# EAGLE board untitled (EAGLE 9.3.2)
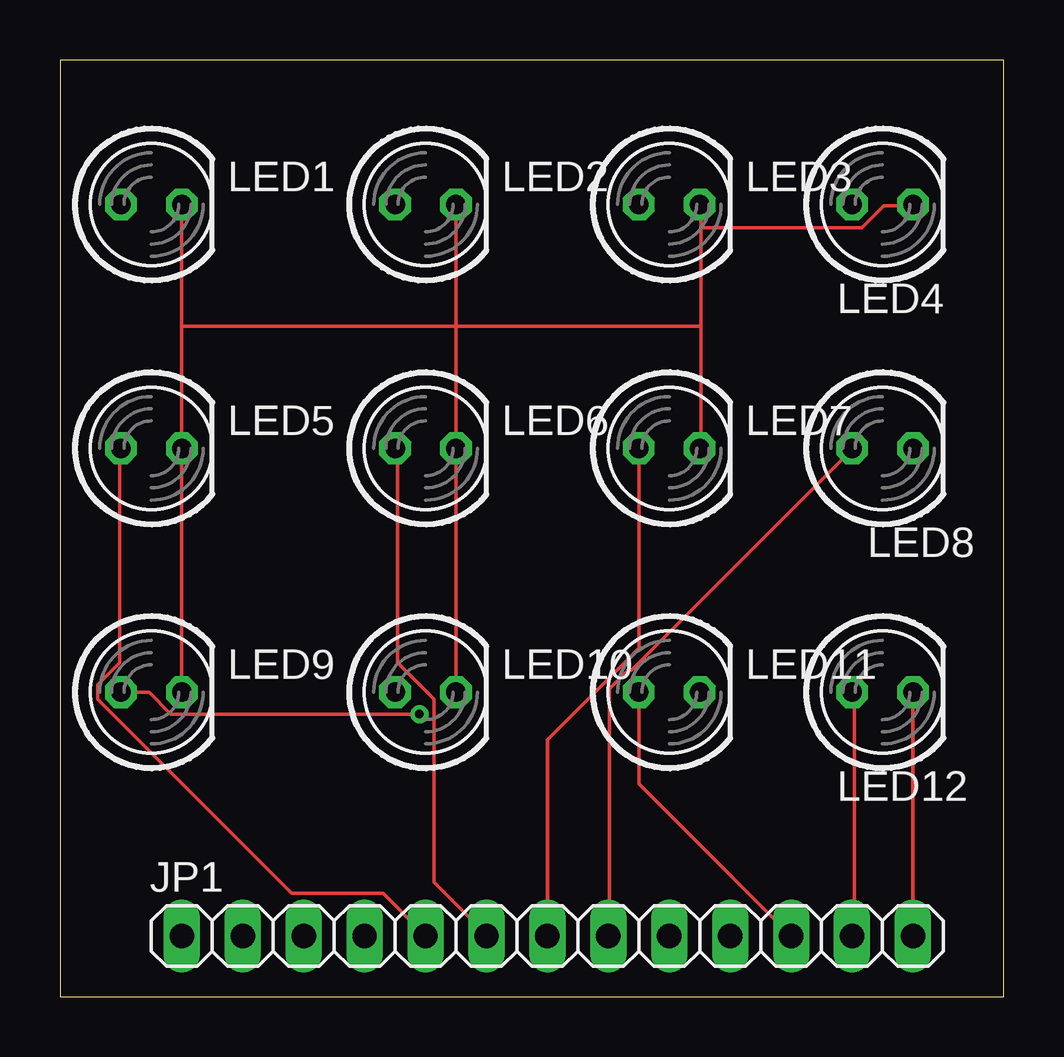
[diagram p0: board, top side]
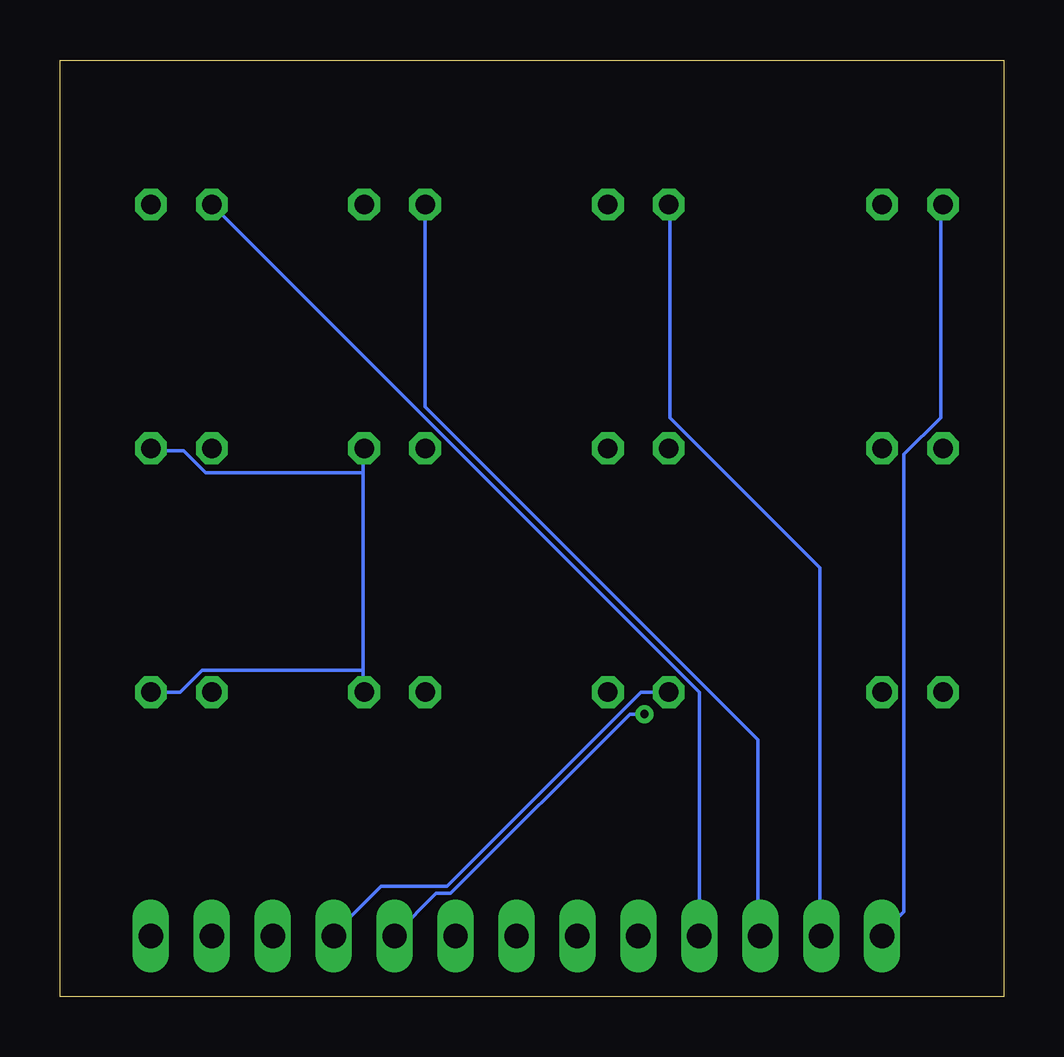
[diagram p1: board, bottom side, seen from below]

Size 39.35 x 39.04 mm. Coordinates in mm from the lower left corner, seen from the top.
Outline: 0,0 39.35,0 39.35,39.04 0,39.04 0,0
Copper layers (1*16): Top 0.035mm / dielectric 1.5mm / Bottom 0.035mm
Design rules "default": minimum track width 6mil, minimum drill 0.35mm, track to track 6mil, track to pad 6mil, pad to pad 6mil, via to via 6mil, smd to smd 6mil, copper to edge 40mil, drill to drill 6mil, minimum pad ring 10mil, minimum via ring 8mil, stop-mask expansion 4mil, vias tented up to drill 0mil, thermal gap 10mil

## Footprints (pad centres in the part's own frame; a part is rotated, then mirrored left to right if it is on the bottom)
1X13 = drill 1.016 long: 1 -15.24,0; 2 -12.7,0; 3 -10.16,0; 4 -7.62,0; 5 -5.08,0; 6 -2.54,0; 7 0,0; 8 2.54,0; 9 5.08,0; 10 7.62,0; 11 10.16,0; 12 12.7,0; 13 15.24,0
LED5MM = drill 0.813 octagon: A -1.27,0; K 1.27,0

## Placement (x,y rotation side)
JP1  [1X13]  20.32,2.54 0 top
LED1  [LED5MM]  3.81,33.02 0 top
LED2  [LED5MM]  15.24,33.02 0 top
LED3  [LED5MM]  25.4,33.02 0 top
LED4  [LED5MM]  34.29,33.02 0 top
LED5  [LED5MM]  3.81,22.86 0 top
LED6  [LED5MM]  15.24,22.86 0 top
LED7  [LED5MM]  25.4,22.86 0 top
LED8  [LED5MM]  34.29,22.86 0 top
LED9  [LED5MM]  3.81,12.7 0 top
LED10  [LED5MM]  15.24,12.7 0 top
LED11  [LED5MM]  25.4,12.7 0 top
LED12  [LED5MM]  34.29,12.7 0 top

## Library data of the parts
JP1 = pinhead
LED1-LED12 = led

## Nets
N$1: JP1.1 LED1.A
N$2: JP1.2 LED2.A
N$3: JP1.3 LED3.A
N$4: JP1.4 LED4.A
N$5: JP1.5 LED5.A
N$6: JP1.6 LED6.A
N$7: JP1.7 LED7.A
N$8: JP1.8 LED8.A
N$9: JP1.9 LED9.A
N$10: JP1.10 LED10.A
N$11: JP1.11 LED11.A
N$12: JP1.12 LED12.A
N$13: JP1.13 LED1.K LED2.K LED3.K LED4.K LED5.K LED6.K LED7.K LED8.K LED9.K LED10.K LED11.K LED12.K

## Tracks (layer width: path | path; a pad name or v marks a point on that pad's centre or on a via)
N$1
  Bottom 0.152: LED1.A 2.64,32.97 2.64,24.13 4.17,22.61 4.17,3.56 5.08,2.64 JP1.1
N$2
  Bottom 0.152: LED2.A 13.92,32.97 13.92,24.13 7.67,17.88 7.67,2.64 JP1.2
N$3
  Bottom 0.152: LED3.A 24.13,24.59 10.26,10.72 10.26,2.64 JP1.3
N$4
  Bottom 0.152: LED4.A 12.7,12.7 JP1.4
N$5
  Top 0.152: JP1.5 13.46,4.32 9.65,4.32 1.57,12.39 1.57,13.01 2.49,13.92 2.49,22.76 LED5.A
N$6
  Top 0.152: LED6.A 14.07,22.76 14.07,13.92 15.6,12.39 15.6,4.78 17.73,2.64 JP1.6
N$7
  Top 0.152: LED7.A 24.13,14.53 20.32,10.72 JP1.7
N$8
  Top 0.152: LED8.A 32.97,22.76 23.82,13.61 23.67,13.61 22.91,12.85 22.91,2.64 JP1.8
N$9  (via drill 0.35)
  Top 0.152: LED9.A 3.71,12.7 4.62,11.79 v14.99,11.79
  Bottom 0.152: v14.99,11.79 15.6,11.79 23.06,4.32 23.67,4.32 25.35,2.64 JP1.9
N$10
  Bottom 0.152: LED10.A 15.14,12.7 23.22,4.62 25.96,4.62 27.94,2.64 JP1.10
N$11
  Top 0.152: LED11.A 24.13,8.89 JP1.11
N$12
  Top 0.152: LED12.A 33.12,12.7 33.12,2.64 JP1.12
N$13
  Top 0.152: LED9.K LED5.K 5.08,27.94 | 5.08,27.94 LED1.K | LED10.K LED6.K 16.51,27.94 | 16.51,27.94 LED2.K | 16.51,27.94 5.08,27.94 | 26.72,27.94 26.72,22.91 LED7.K | 26.72,27.94 26.72,32.05 | 26.72,32.05 26.72,32.97 LED3.K | 26.72,32.05 33.43,32.05 34.34,32.97 35.56,32.97 LED4.K | LED12.K JP1.13 | 26.72,27.94 16.51,27.94
  Bottom 0.152: 26.72,21.84 26.72,22.76 LED7.K | 26.72,21.84 26.72,13.61 | 26.72,13.61 26.72,12.7 LED11.K | LED12.K 34.34,12.7 33.43,13.61 26.72,13.61 | 26.72,21.84 33.27,21.84 34.19,22.76 35.56,22.76 LED8.K